# EAGLE board MOD-v2-3b (EAGLE 8.3.1)
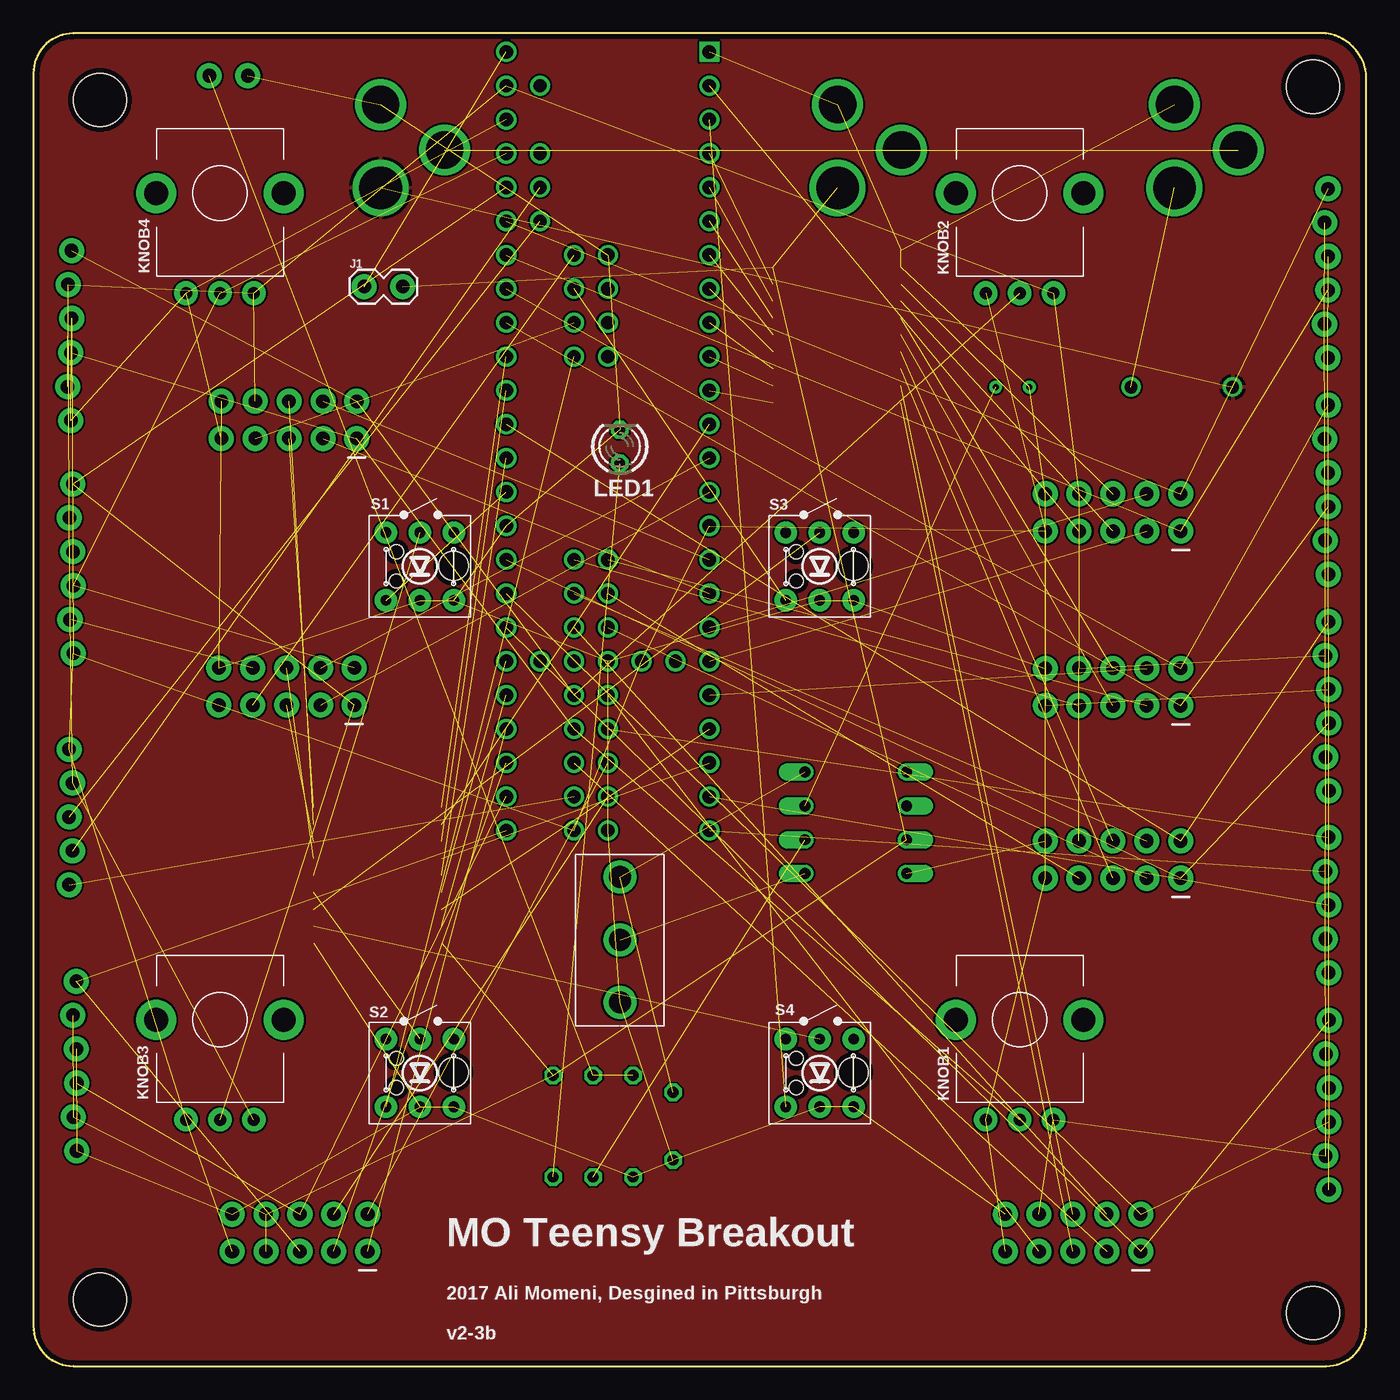
[diagram p0: board, top side]
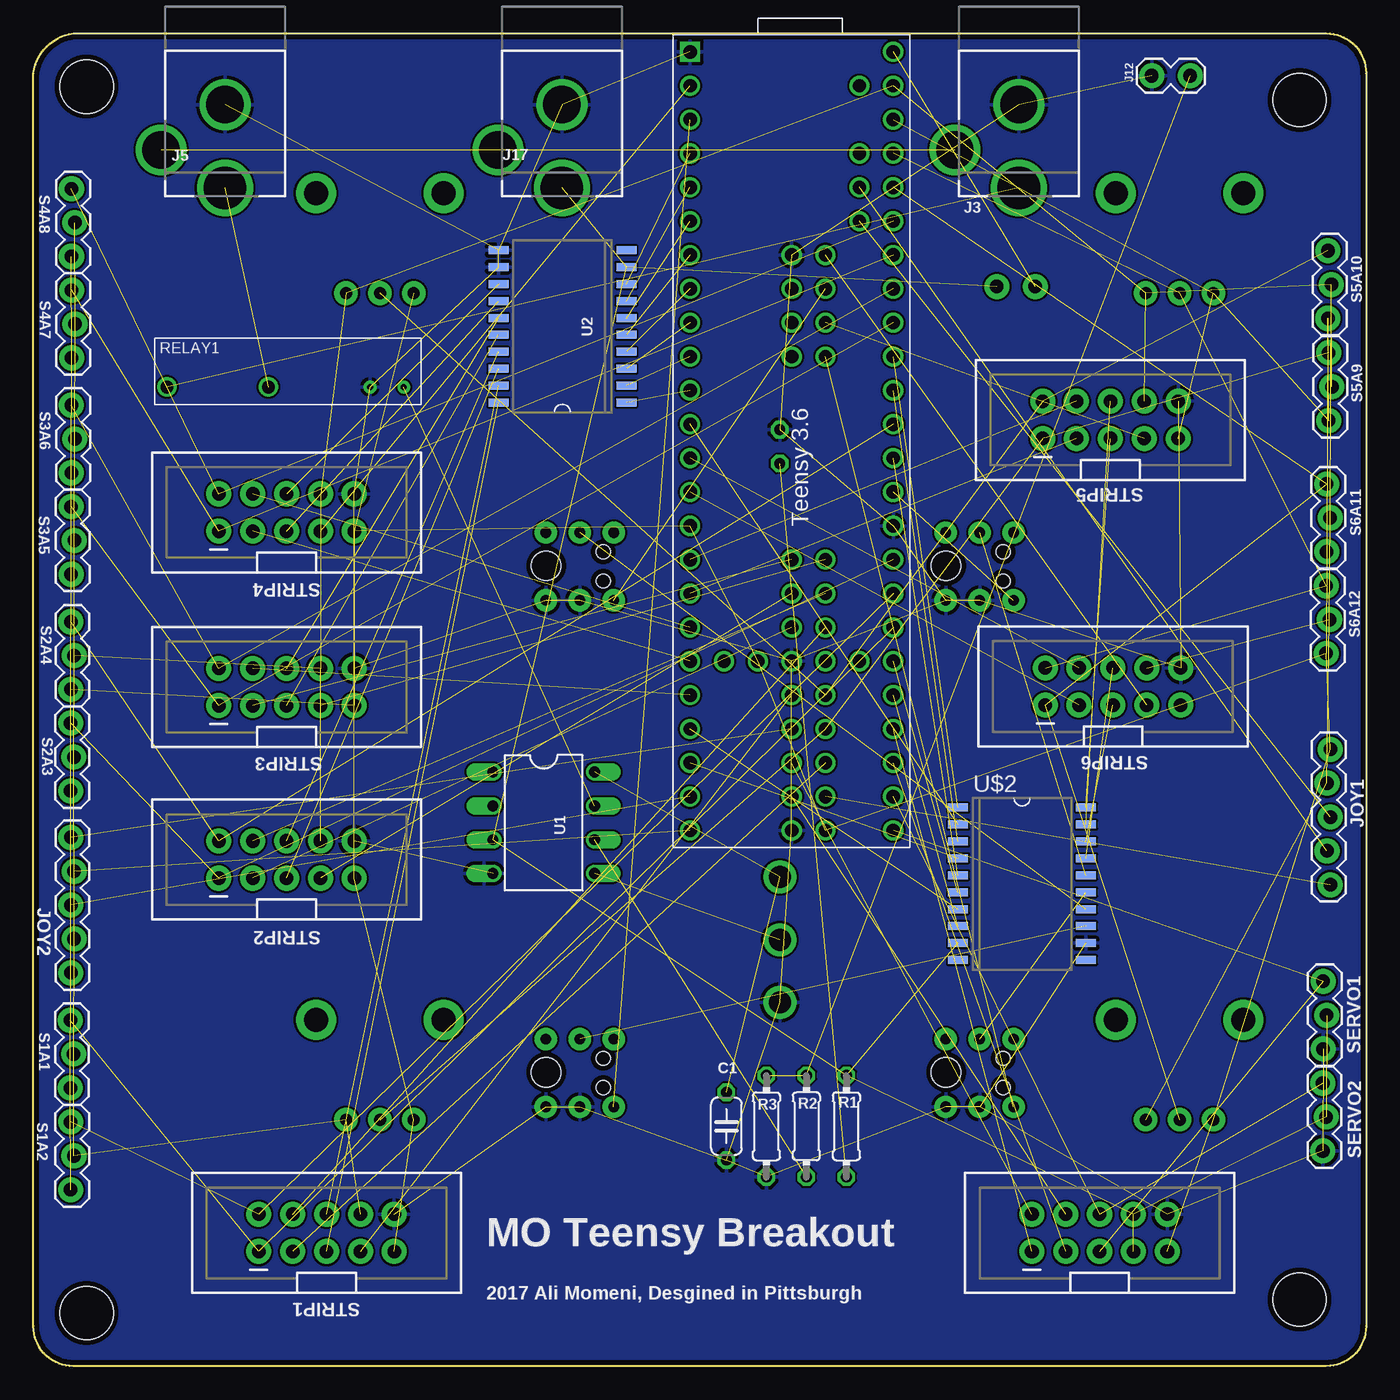
[diagram p1: board, bottom side, seen from below]

Size 100 x 100 mm. Coordinates in mm from the lower left corner, seen from the top.
Outline: 3,100 arc90 0,97 0,3 arc90 3,0 97,0 arc90 100,3 100,97 arc74 97,100 3,100
Copper layers (1*16): Top 0.035559375mm / dielectric 1.501140625mm / Bottom 0.035559375mm
Design rules "typical_4pcb *": minimum track width 10mil, minimum drill 15mil, track to track 6mil, track to pad 10mil, pad to pad 10mil, via to via 10mil, smd to smd 10mil, copper to edge 15mil, drill to drill 8mil, minimum pad ring 10mil, minimum via ring 8mil, stop-mask expansion 4mil, vias tented up to drill 0mil, thermal gap 10mil
Net classes: 2 Power: width 0.406 mm, clearance 0.305 mm; 3 Analog Sig: width 0.406 mm, clearance 0.305 mm
Holes 4 mm at 5,5 96,4 96,96 5,95

## Footprints (pad centres in the part's own frame; a part is rotated, then mirrored left to right if it is on the bottom)
C050-024X044 = drill 0.813 octagon: 1 -2.54,0; 2 2.54,0
1X02_LOCK = drill 1.016 pad 1.88: 1 -0.178,0; 2 2.718,0
DCJACK_2MM_PTH = drill 2.8: GND 0,7.35; GNDBREAK 4.8,10.75 | drill 3.2: PWR 0,13.6
2X5-SHROUDED_LOCK = drill 1.016 pad 1.88: 1 -1.397,5.08; 2 1.397,5.08; 3 -1.397,2.54; 4 1.397,2.54; 5 -1.397,0; 6 1.397,0; 7 -1.397,-2.54; 8 1.397,-2.54; 9 -1.397,-5.08; 10 1.397,-5.08
1X05_LOCK = drill 1.016 pad 1.88: 1 0,0.127; 2 2.54,-0.127; 3 5.08,0.127; 4 7.62,-0.127; 5 10.16,0.127
POT_ALPHA_RD901F-40-(L)R1 = drill 0.9 pad 1.778: 1 -2.54,-7.5; 2 0,-7.5; 3 2.54,-7.5 | drill 1.8 pad 3: M1 -4.8,0; M2 4.8,0
LED3MM = drill 0.813 octagon: A -1.27,0; K 1.27,0
0204/7 = drill 0.813 octagon: 1 -3.81,0; 2 3.81,0
G6DN-1A = drill 0.45: 1 0,0; 2 2.54,0 | drill 0.95: 5 10.16,0; 8 17.78,0
SWITCH_TR2-MOMENTARY-LED = drill 0.8 pad 1.676: 1 2.54,-2.54; 2 2.54,2.54; 3 -2.54,-2.54; 4 -2.54,2.54; A 0,2.54; C 0,-2.54 | hole 2.2: 2.53,0.05 | hole 1.05: -1.76,1.1; -1.76,-1.09
1X03_LOCK = drill 1.016 pad 1.88: 1 0,0.127; 2 2.54,-0.127; 3 5.08,0.127
1X03_LOCK@1 = drill 1.016 pad 1.88: 1 0,0.127; 2 2.54,-0.127; 3 5.08,0.127
SWITCH_SPDT_500SSP1S2M2QEA = drill 1.65: 1 -4.7,0; 2 0,0; 3 4.7,0
TEENSY3-6_NO-USB-HOST = drill 1: 0 3.81,1.27; 1 6.35,1.27; 2 8.89,1.27; 3 11.43,1.27; 3V3(1) 36.83,1.27; 3V3(2) 46.99,6.35; 3V3(3) 6.35,16.51; 3V3(4) 59.69,11.43; 4 13.97,1.27; 5 16.51,1.27; 6 19.05,1.27; 7 21.59,1.27; 8 24.13,1.27; 9 26.67,1.27; 10 29.21,1.27; 11 31.75,1.27; 12 34.29,1.27; 13 34.29,16.51; 14 31.75,16.51; 15 29.21,16.51; 16 26.67,16.51; 17 24.13,16.51; 18 21.59,16.51; 19 19.05,16.51; 20 16.51,16.51; 21 13.97,16.51; 22 11.43,16.51; 23 8.89,16.51; 24 39.37,1.27; 25 41.91,1.27; 26 44.45,1.27; 27 46.99,1.27; 28 49.53,1.27; 29 52.07,1.27; 30 54.61,1.27; 31 57.15,1.27; 32 59.69,1.27; 33 59.69,16.51; 34 57.15,16.51; 35 54.61,16.51; 36 52.07,16.51; 37 49.53,16.51; 38 46.99,16.51; 39 44.45,16.51; 40 39.37,8.89; 41 41.91,8.89; 42 44.45,8.89; 43 49.53,8.89; 44 52.07,8.89; 45 54.61,8.89; 46 57.15,8.89; 47 57.15,11.43; 48 54.61,11.43; 49 52.07,11.43; 50 49.53,11.43; 51 44.45,11.43; 52 41.91,11.43; 53 39.37,11.43; 54 24.13,11.43; 55 21.59,11.43; 56 19.05,11.43; 57 16.51,11.43; A10 11.43,13.97; A11 13.97,13.97; AGND 3.81,16.51; AREF 8.89,13.97; DAC0 41.91,16.51; DAC1 39.37,16.51; DC 21.59,8.89; DD 24.13,8.89; DE 19.05,8.89; G1 46.99,8.89; G2 36.83,16.51; G3 59.69,8.89; G6 16.51,8.89; P 46.99,11.43; R 46.99,13.97; VBAT 46.99,3.81; VIN 1.27,16.51; VUSB 3.81,13.97 | drill 1 square: G0 1.27,1.27
DIL08 = drill 0.813 offset: 1 -3.81,-3.81; 2 -1.27,-3.81; 3 1.27,-3.81; 4 3.81,-3.81; 5 3.81,3.81; 6 1.27,3.81; 7 -1.27,3.81; 8 -3.81,3.81
SOIC20 = smd 0.6 x 1.5: 1 -5.715,-4.8; 2 -4.445,-4.8; 3 -3.175,-4.8; 4 -1.905,-4.8; 5 -0.635,-4.8; 6 0.635,-4.8; 7 1.905,-4.8; 8 3.175,-4.8; 9 4.445,-4.8; 10 5.715,-4.8; 11 5.715,4.8; 12 4.445,4.8; 13 3.175,4.8; 14 1.905,4.8; 15 0.635,4.8; 16 -0.635,4.8; 17 -1.905,4.8; 18 -3.175,4.8; 19 -4.445,4.8; 20 -5.715,4.8

## Placement (x,y rotation side)
C1  10uF  [C050-024X044]  48,18 270 bottom
J1  Teensy-5V  [1X02_LOCK]  25,81 0 top
J3  TO Pi  [DCJACK_2MM_PTH]  26.06,102 180 bottom
J4  ACTUATORS  [2X5-SHROUDED_LOCK]  20,10 90 bottom
J5  +5V (Pi)  [DCJACK_2MM_PTH]  85.61,102 180 bottom
J12  RPi-Shutdown  [1X02_LOCK]  13.38,96.82 180 bottom
J17  +5V (Main)  [DCJACK_2MM_PTH]  60.34,102 180 bottom
JOY1  JOY1  [1X05_LOCK]  2.81,46.28 270 bottom
JOY2  JOY2  [1X05_LOCK]  97.06,29.52 90 bottom
KNOB1  [POT_ALPHA_RD901F-40-(L)R1]  74,26 0 top
KNOB2  [POT_ALPHA_RD901F-40-(L)R1]  74,88 0 top
KNOB3  [POT_ALPHA_RD901F-40-(L)R1]  14,26 0 top
KNOB4  [POT_ALPHA_RD901F-40-(L)R1]  14,88 0 top
LED1  [LED3MM]  44,69 90 top
R1  330  [0204/7]  39,18 270 bottom
R2  2.2K  [0204/7]  42,18 90 bottom
R3  3.3K  [0204/7]  45,18 270 bottom
RELAY1  RELAY-OMRON-G6DN  [G6DN-1A]  72.2,73.46 180 bottom
S1  SW-LEDPTH  [SWITCH_TR2-MOMENTARY-LED]  29,60 0 top
S1A1  AN5  [1X03_LOCK]  97.1,20.88 90 bottom
S1A2  AN6  [1X03_LOCK]  97.08,13.24 90 bottom
S2  SW-LEDPTH  [SWITCH_TR2-MOMENTARY-LED]  29,22 0 top
S2A3  AN7  [1X03_LOCK]  97.08,43.16 90 bottom
S2A4  AN8  [1X03_LOCK]  97.06,50.77 90 bottom
S3  SW-LEDPTH  [SWITCH_TR2-MOMENTARY-LED]  59,60 0 top
S3A5  AN5  [1X03_LOCK]  97.04,59.41 90 bottom
S3A6  AN6  [1X03_LOCK]  97.02,67.03 90 bottom
S4  SW-LEDPTH  [SWITCH_TR2-MOMENTARY-LED]  59,22 0 top
S4A7  AN7  [1X03_LOCK]  97,75.65 90 bottom
S4A8  AN8  [1X03_LOCK]  97.01,83.26 90 bottom
S5A9  AN5  [1X03_LOCK]  2.69,70.95 90 bottom
S5A10  AN6  [1X03_LOCK]  2.74,78.61 90 bottom
S6A11  AN7  [1X03_LOCK]  2.83,61.11 90 bottom
S6A12  AN8  [1X03_LOCK]  2.88,53.47 90 bottom
SERVO1  SERVO1  [1X03_LOCK@1]  3.1,23.79 90 bottom
SERVO2  SERVO2  [1X03_LOCK@1]  3.13,16.16 90 bottom
STRIP1  [2X5-SHROUDED_LOCK]  78,10 90 bottom
STRIP2  [2X5-SHROUDED_LOCK]  81,38.01 90 bottom
STRIP3  [2X5-SHROUDED_LOCK]  81,50.96 90 bottom
STRIP4  [2X5-SHROUDED_LOCK]  81,64.05 90 bottom
STRIP5  [2X5-SHROUDED_LOCK]  19.19,71 90 bottom
STRIP6  [2X5-SHROUDED_LOCK]  19,50.99 90 bottom
SW2  500SSP1S2M2QEA  [SWITCH_SPDT_500SSP1S2M2QEA]  44,32 270 top
TEENSY  TEENSY3_6-ALI_NO-USB-HOST  [TEENSY3-6_NO-USB-HOST]  51.99,99.88 270 bottom
U1  ATTINY85  [DIL08]  61.71,40.77 270 bottom
U2  A2982  [SOIC20]  60.31,78.01 90 bottom
U$2  A2982  [SOIC20]  25.82,36.19 270 bottom

## Library data of the parts
C1 = resistor
J1 = SparkFun-Connectors
J3 J5 J17 = adafruit
J4 STRIP1-STRIP6 = SparkFun-Connectors; PROD_ID: CONN-08671; SF_ID: PRT-08506
J12 = SparkFun-Connectors; GND: GND; SIG: SIG
JOY1 = SparkFun-Connectors; B: B; GND: gnd; H: H; V: V; VCC: vcc
JOY2 = SparkFun-Connectors; B: B; GND: GND; H: H; V: V; VCC: VCC
KNOB1-KNOB4 RELAY1 S1-S4 TEENSY U1 U2 U$2 = CMU-ArtFab
LED1 = led; GND: -; P: +
R1-R3 = rcl
S1A1 = SparkFun-Connectors; AN2: AN2; GND: GND; VCC: VCC
S1A2 = SparkFun-Connectors; AN1: AN1; GND: GND; VCC: VCC
S2A3 = SparkFun-Connectors; AN3: AN3; GND: GND; VCC: VCC
S2A4 = SparkFun-Connectors; AN4: AN4; GND: GND; VCC: VCC
S3A5 = SparkFun-Connectors; AN5: AN5; GND: GND; VCC: VCC
S3A6 = SparkFun-Connectors; AN6: AN6; GND: GND; VCC: VCC
S4A7 = SparkFun-Connectors; AN7: AN7; GND: GND; VCC: VCC
S4A8 = SparkFun-Connectors; AN8: AN8; GND: GND; VCC: VCC
S5A9 = SparkFun-Connectors; AN9: AN9; GND: GND; VCC: VCC
S5A10 = SparkFun-Connectors; AN10: AN10; GND: GND; VCC: VCC
S6A11 = SparkFun-Connectors; AN11: AN11; GND: GND; VCC: VCC
S6A12 = SparkFun-Connectors; AN12: AN12; GND: GND; VCC: VCC
SERVO1 SERVO2 = SparkFun-Connectors; 5V: +5V; GND: GND; SIG: SIG
SW2 = CMU-ArtFab; DIGIKEY: EG5137-ND

## Nets
+3V3: J4.9 JOY1.1 JOY2.1 KNOB1.1 KNOB2.1 KNOB3.1 KNOB4.1 S1A1.1 S1A2.1 S2A3.1 S2A4.1 S3A5.1 S3A6.1 S4A7.1 S4A8.1 S5A9.1 S5A10.1 S6A11.1 S6A12.1 STRIP1.9 STRIP2.9 STRIP3.9 STRIP4.9 STRIP5.9 STRIP6.9 TEENSY.3V3(1) TEENSY.3V3(2) TEENSY.3V3(3) TEENSY.3V3(4)
+5V [Power]: J1.2 J4.7 J4.8 J17.PWR R1.1 SERVO1.2 SERVO2.2 U1.3 U2.9 U$2.9
+5V-BATTERY: C1.1 SW2.1 U1.8
+5V-BATTERY-PI: J5.PWR RELAY1.5
AGND [Analog Sig]: JOY1.2 JOY2.2 KNOB1.3 KNOB2.3 KNOB3.3 KNOB4.3 S1A1.2 S1A2.2 S2A3.2 S2A4.2 S3A5.2 S3A6.2 S4A7.2 S4A8.2 S5A9.2 S5A10.2 S6A11.2 S6A12.2 STRIP1.8 STRIP2.8 STRIP3.8 STRIP4.8 STRIP5.8 STRIP6.8 TEENSY.AGND
AN1 [Analog Sig]: S1A1.3 STRIP1.1 TEENSY.39
AN2 [Analog Sig]: S1A2.3 STRIP1.2 TEENSY.DAC0
AN3 [Analog Sig]: S2A3.3 STRIP2.1 TEENSY.DAC1
AN4 [Analog Sig]: S2A4.3 STRIP2.2 TEENSY.15
AN5 [Analog Sig]: S3A5.3 STRIP3.1 TEENSY.18
AN6 [Analog Sig]: S3A6.3 STRIP3.2 TEENSY.19
AN7 [Analog Sig]: S4A7.3 STRIP4.1 TEENSY.20
AN8 [Analog Sig]: S4A8.3 STRIP4.2 TEENSY.21
AN9 [Analog Sig]: KNOB1.2 S5A9.3 STRIP5.1 TEENSY.49
AN10 [Analog Sig]: KNOB2.2 S5A10.3 STRIP5.2 TEENSY.50
AN11 [Analog Sig]: KNOB3.2 S6A11.3 STRIP6.1 TEENSY.22
AN12 [Analog Sig]: KNOB4.2 S6A12.3 STRIP6.2 TEENSY.23
B1: STRIP1.3 TEENSY.48
B2: STRIP1.4 TEENSY.51
B3: STRIP2.3 TEENSY.42
B4: STRIP2.4 TEENSY.52
B5: STRIP3.3 TEENSY.40
B6: STRIP3.4 TEENSY.28
B7: STRIP4.3 TEENSY.27
B8: STRIP4.4 TEENSY.26
B9: STRIP5.3 TEENSY.25
B10: STRIP5.4 TEENSY.24
B11: STRIP6.3 TEENSY.12
B12: STRIP6.4 TEENSY.11
B13: S1.3 TEENSY.13
B14: S2.3 TEENSY.54
B15: S3.3 TEENSY.56
B16: S4.3 TEENSY.1
GND: C1.2 J3.GND J4.10 J5.GND J12.2 J17.GND LED1.K R3.2 RELAY1.2 S1.1 S1.C S2.1 S2.C S3.1 S3.C S4.1 S4.C SERVO1.1 SERVO2.1 STRIP1.10 STRIP2.10 STRIP3.10 STRIP4.10 STRIP5.10 STRIP6.10 SW2.3 TEENSY.G0 TEENSY.G1 TEENSY.G2 TEENSY.G3 TEENSY.G6 U1.4 U2.11 U2.12 U$2.12
GNDBREAK: J3.GNDBREAK J5.GNDBREAK J17.GNDBREAK
JOYB1: JOY1.5 TEENSY.47
JOYB2: JOY2.5 TEENSY.44
JOYH1 [Analog Sig]: JOY1.3 TEENSY.A11
JOYH2 [Analog Sig]: JOY2.3 TEENSY.31
JOYV1 [Analog Sig]: JOY1.4 TEENSY.A10
JOYV2 [Analog Sig]: JOY2.4 TEENSY.32
LED1: STRIP1.7 TEENSY.43
LED2: STRIP2.7 TEENSY.41
LED3: STRIP3.7 TEENSY.53
LED4: STRIP4.7 TEENSY.0
LED5: STRIP5.7 TEENSY.55
LED6: STRIP6.7 TEENSY.57
M_INA: J4.2 TEENSY.45
M_INB: J4.4 TEENSY.46
M_PWMA: J4.1 TEENSY.36
M_PWMB: J4.3 TEENSY.35
N$2: LED1.A R1.2
N$3: SW2.2 U1.5
N$4: RELAY1.1 U1.7
N$5: J12.1 R2.2 R3.1
N$6: J3.PWR RELAY1.8
N$7: J1.1 TEENSY.VIN
PI-REST: R2.1 U1.6
PWM1: TEENSY.2 U2.8
PWM2: TEENSY.3 U2.7
PWM3: TEENSY.4 U2.6
PWM4: TEENSY.5 U2.5
PWM5: TEENSY.6 U2.4
PWM6: TEENSY.7 U2.3
PWM7: TEENSY.8 U2.2
PWM8: TEENSY.9 U2.1
PWM9: TEENSY.37 U$2.8
PWM10: TEENSY.29 U$2.7
PWM11: TEENSY.38 U$2.6
PWM12: TEENSY.14 U$2.5
PWM13: TEENSY.30 U$2.4
PWM14: TEENSY.16 U$2.3
PWM15: TEENSY.10 U$2.2
PWM16: TEENSY.17 U$2.1
PWM_1: STRIP1.5 U2.20
PWM_2: STRIP1.6 U2.19
PWM_3: STRIP2.5 U2.18
PWM_4: STRIP2.6 U2.17
PWM_5: STRIP3.5 U2.16
PWM_6: STRIP3.6 U2.15
PWM_7: STRIP4.5 U2.14
PWM_8: STRIP4.6 U2.13
PWM_9: STRIP5.5 U$2.20
PWM_10: STRIP5.6 U$2.19
PWM_11: STRIP6.5 U$2.18
PWM_12: STRIP6.6 U$2.17
PWM_13: S1.A U$2.16
PWM_14: S2.A U$2.15
PWM_15: S3.A U$2.14
PWM_16: S4.A U$2.13
S1: J4.5 SERVO1.3 TEENSY.33
S2: J4.6 SERVO2.3 TEENSY.34

## Tracks (layer width: path | path; a pad name or v marks a point on that pad's centre or on a via)
+3V3  (28 unrouted)
+5V  (9 unrouted)
+5V-BATTERY  (2 unrouted)
+5V-BATTERY-PI  (1 unrouted)
AGND  (24 unrouted)
AN1  (2 unrouted)
AN2  (2 unrouted)
AN3  (2 unrouted)
AN4  (2 unrouted)
AN5  (2 unrouted)
AN6  (2 unrouted)
AN7  (2 unrouted)
AN8  (2 unrouted)
AN9  (3 unrouted)
AN10  (3 unrouted)
AN11  (3 unrouted)
AN12  (3 unrouted)
B1  (1 unrouted)
B2  (1 unrouted)
B3  (1 unrouted)
B4  (1 unrouted)
B5  (1 unrouted)
B6  (1 unrouted)
B7  (1 unrouted)
B8  (1 unrouted)
B9  (1 unrouted)
B10  (1 unrouted)
B11  (1 unrouted)
B12  (1 unrouted)
B13  (1 unrouted)
B14  (1 unrouted)
B15  (1 unrouted)
B16  (1 unrouted)
GND  (34 unrouted)
  pour Bottom: -10,109 -10,-10 -8,-12 112,-12 114,-10 114,113 113,114 -4,114 -9,109
GNDBREAK  (2 unrouted)
JOYB1  (1 unrouted)
JOYB2  (1 unrouted)
JOYH1  (1 unrouted)
JOYH2  (1 unrouted)
JOYV1  (1 unrouted)
JOYV2  (1 unrouted)
LED1  (1 unrouted)
LED2  (1 unrouted)
LED3  (1 unrouted)
LED4  (1 unrouted)
LED5  (1 unrouted)
LED6  (1 unrouted)
M_INA  (1 unrouted)
M_INB  (1 unrouted)
M_PWMA  (1 unrouted)
M_PWMB  (1 unrouted)
N$2  (1 unrouted)
N$3  (1 unrouted)
N$4  (1 unrouted)
N$5  (2 unrouted)
N$6  (1 unrouted)
  pour Top: -2,103 -2,-4 107,-4 109,-2 109,95 109,99 98,110 5,110
N$7  (1 unrouted)
PI-REST  (1 unrouted)
PWM1  (1 unrouted)
PWM2  (1 unrouted)
PWM3  (1 unrouted)
PWM4  (1 unrouted)
PWM5  (1 unrouted)
PWM6  (1 unrouted)
PWM7  (1 unrouted)
PWM8  (1 unrouted)
PWM9  (1 unrouted)
PWM10  (1 unrouted)
PWM11  (1 unrouted)
PWM12  (1 unrouted)
PWM13  (1 unrouted)
PWM14  (1 unrouted)
PWM15  (1 unrouted)
PWM16  (1 unrouted)
PWM_1  (1 unrouted)
PWM_2  (1 unrouted)
PWM_3  (1 unrouted)
PWM_4  (1 unrouted)
PWM_5  (1 unrouted)
PWM_6  (1 unrouted)
PWM_7  (1 unrouted)
PWM_8  (1 unrouted)
PWM_9  (1 unrouted)
PWM_10  (1 unrouted)
PWM_11  (1 unrouted)
PWM_12  (1 unrouted)
PWM_13  (1 unrouted)
PWM_14  (1 unrouted)
PWM_15  (1 unrouted)
PWM_16  (1 unrouted)
S1  (2 unrouted)
S2  (2 unrouted)

## Text on the board
tPlace: MO Teensy Breakout | 2017 Ali Momeni, Desgined in Pittsburgh | v2-3b
bPlace: MO Teensy Breakout | 2017 Ali Momeni, Desgined in Pittsburgh